# Altium PCB USB_C_PD_Sink.PcbDoc
Units mil, origin at the board's own origin, x right, y up, seen from the top; angles counter-clockwise.
Board outline 1181.1 x 787.4 mil, 2 copper layers (Top Layer, Bottom Layer); 22 components, 18 nets, 88 pads, 15 vias.
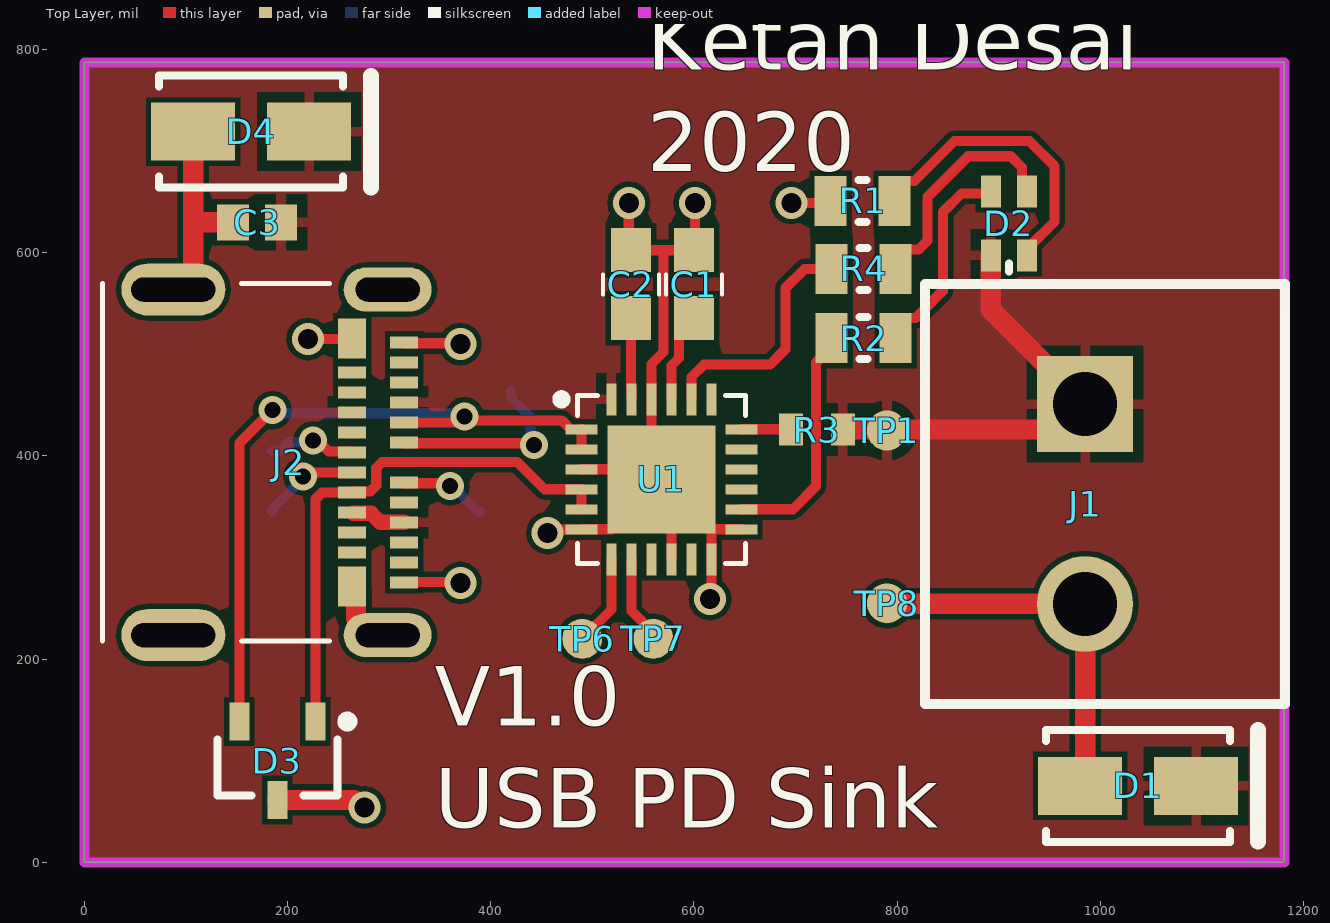
[diagram p0: Top Layer view]
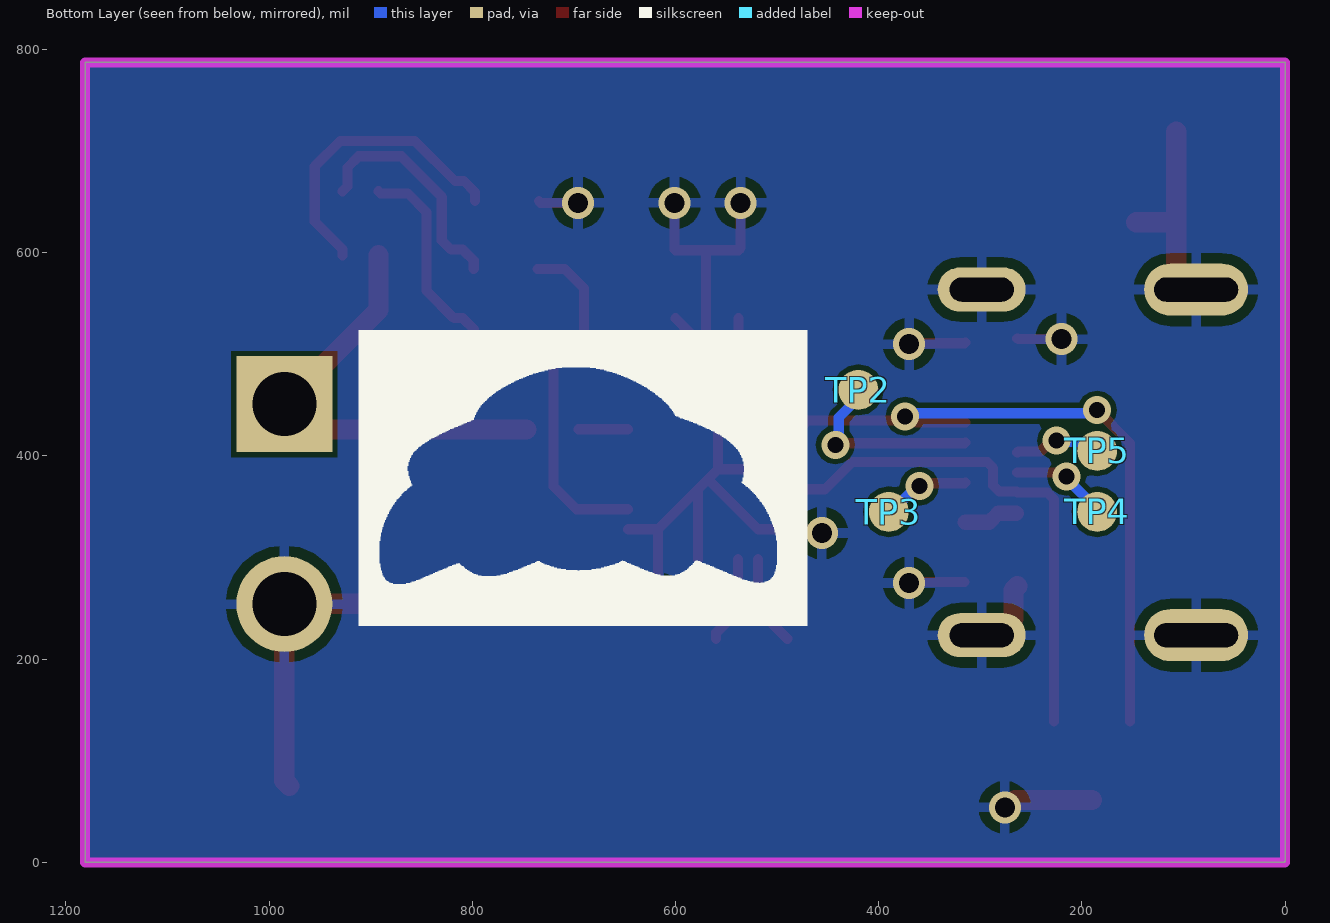
[diagram p1: Bottom Layer view, seen from below]
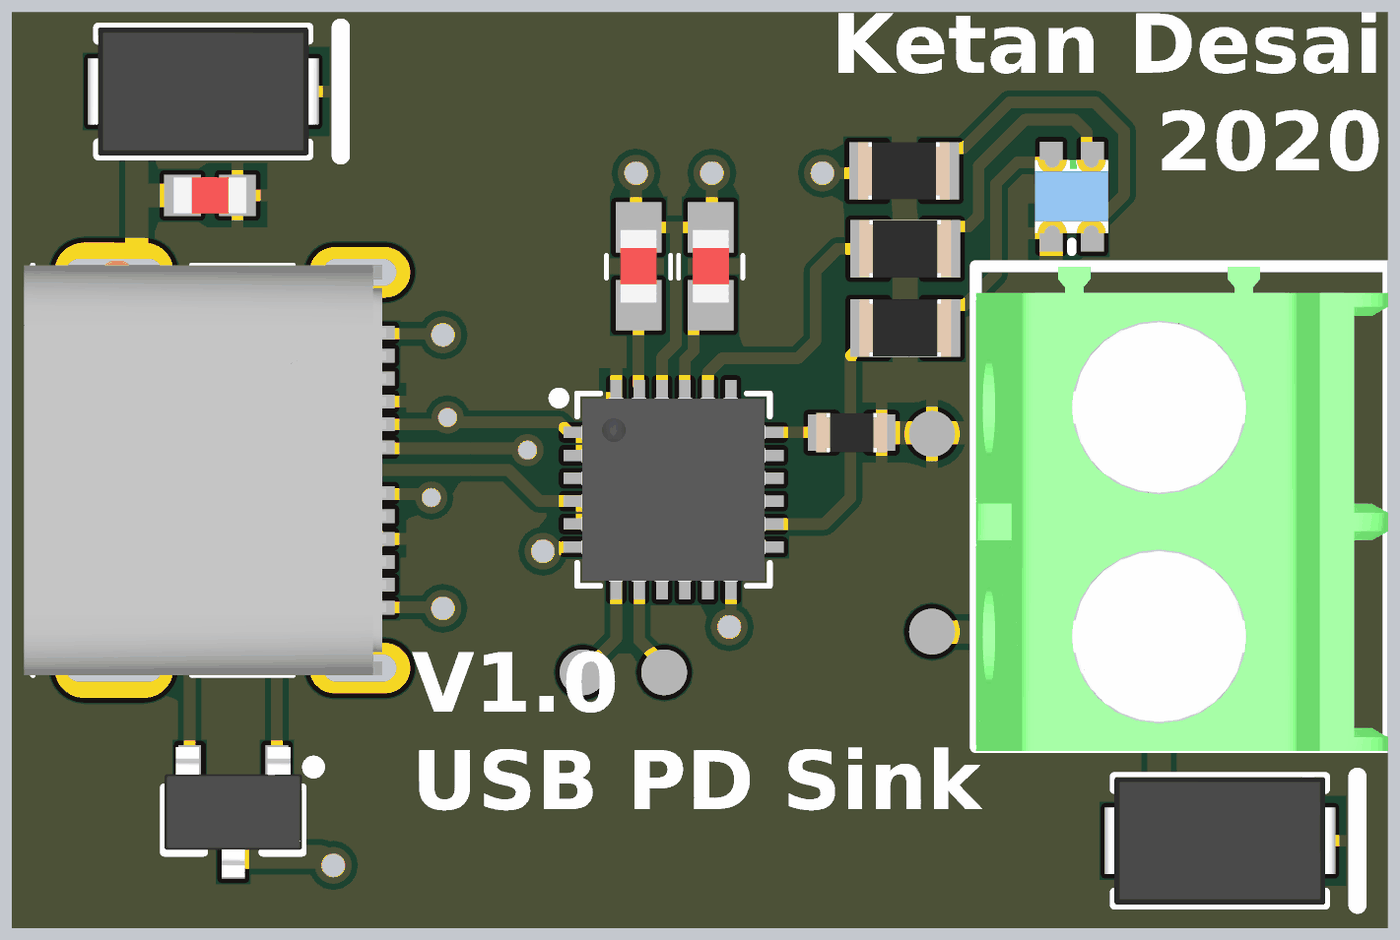
[diagram p2: 3D render of the assembled board from above, using the file's embedded part models]

## Layer stack, top to bottom
Top Solder: solder mask 0.4, Solder Resist, Dk 3.5
Top Layer: signal copper 1.4
Dielectric 1: dielectric 12.6, FR-4, Dk 4.8
Bottom Layer: signal copper 1.4
Bottom Solder: solder mask 0.4, Solder Resist, Dk 3.5

## Board outline
0,0 1181.1,0 1181.1,787.4 0,787.4

## Design rules (kind name [scope] priority, off if disabled: settings)
Clearance [All] p1: gap=5 ignorepadtopadclearanceinfootprint=FALSE
PolygonConnect [All] p1: connectstyle=Relief reliefconductorwidth=10 reliefentries=4 polygonreliefangle="90 Angle" airgapwidth=10
RoutingVias [All] p1: holewidth=27.56 width=39.37 viastyle="Through Hole" minholewidth=15.75 minwidth=27.56 maxholewidth=19.68 maxwidth=31.5
SolderMaskExpansion [All] p1: expansion=4 istentingtop=FALSE
Width [All] p1: maxlimit=20 minlimit=7 preferedwidth=10
30 further rules are at their usual default settings.

## Components (designator, comment, footprint, x,y, rotation, side; value= is the part's Value field where it differs from the comment)
C1 "C0603 1uF 10V X7R" C0603-IPC 600,569 r270 top value=1uF
C2 "C0603 1uF 10V X7R" C0603-IPC 538,569 r270 top value=1uF
C3 "4.7uF, 25V, X5R, 0603" C0603-HIGH-DENSITY 170,630 r0 top value=4.7uF
D1 "SMAJ22A" DO-214AC 1033,76 r270 top value=24.4V
D2 "RGB" LED_0606_RGB_WURTH 910,629 r90 top
D3 "ESDA25L" SOT23-3L 190,100 r270 top
D4 "SMAJ22A" DO-214AC 160,720 r270 top value=24.4V
J1 "Phoenix Contact 1935161" Phoenix_1935161 985,352.57 r270 top
J2 "USB C" "Molex USB-C" 166.34,393.7 r270 top locked
R1 "R0805 750 5%" R0805-High-Density 766,651 r0 top value=750
R2 "R0805 750 5%" R0805-High-Density 767,516 r0 top value=750
R3 "R0603 1K 1%" R0603-HIGH-DENSITY 721,426 r0 top value=1k
R4 "R0805 750 5%" R0805-High-Density 767,584 r0 top value=750
TP1 "VBUS" TESTPOINT_SMT 821.5,393.5 r90 top
TP2 "D1+" TESTPOINT_SMT 388.5,433.5 r90 bottom
TP3 "D1-" TESTPOINT_SMT 358.5,313.5 r90 bottom
TP4 "D2+" TESTPOINT_SMT 153.5,313.5 r90 bottom
TP5 "D2-" TESTPOINT_SMT 153.5,373.5 r90 bottom
TP6 "SCL" TESTPOINT_SMT 521.5,188.5 r90 top
TP7 "SDA" TESTPOINT_SMT 591.5,188.5 r90 top
TP8 "VBUS" TESTPOINT_SMT 821.5,223.5 r90 top
U1 "STUSB4500" "QFN24 - 4X4MM - PITCH 0.5MM - EXPOSEDPAD" 568,377 r0 top

## Footprints (in the part's own frame and the unit in brackets; to place one, negate y for a bottom-side part, rotate by r counter-clockwise, add the part's x,y. Pads: shape width x height; smd on the part's side, far side on the other; paste and mask are expansions set on the pad)
C0603-HIGH-DENSITY [mm] "Chip Capacitor, 2-Leads, Body 1.60x0.80mm, IPC High Density"
  rect 0.8x0.9 smd: 1(-0.6,0) 2(0.6,0)
  body extent -0.8,-0.4 0.8,0.4, height 0.3
C0603-IPC [mm]
  rect 1.1x1 smd: 1(-0.85,0) 2(0.85,0)
  silkscreen extent -0.24,-0.7 0.26,0.7, body extent -0.8,-0.4 0.8,0.4, height 0.3
DO-214AC [mm]
  rect 1.45x2.1 smd: 1(0.02,-1.343) 2(0.02,1.557)
  silkscreen extent -1.38,-2.19 1.42,3.11, body extent -1.38,-2.41 1.42,2.63, height 2.29
LED_0606_RGB_WURTH [mm] "Chip; Body 1.6 x 1.6 mm (LxW typ) WURTH"
  rect 0.8x0.5 smd: A(-0.8,0.45) BK(-0.8,-0.45) GK(0.8,-0.45) RK(0.8,0.45)
  silkscreen extent -1.2,0 -1,0, body extent -0.8,-0.8 0.8,0.8, height 0.4
"Molex USB-C" [mm] "MOLEX_105450-0101"
  rect 0.3x0.7 smd: A1(-3,3.77) A2(-2.5,3.77) A3(-2,3.77) A4(-1.5,3.77) A5(-1,3.77) A6(-0.5,3.77) A7(0.5,3.77) A8(1,3.77) A9(1.5,3.77) A10(2,3.77) A11(2.5,3.77) A12(3,3.77) B2(2.25,2.47) B3(1.75,2.47) B4(1.25,2.47) B5(0.75,2.47) B6(0.25,2.47) B7(-0.25,2.47) B8(-0.75,2.47) B9(-1.25,2.47) B10(-1.75,2.47) B11(-2.25,2.47)
  rect 1x0.7 smd: B1(3.1,2.47) B12(-3.1,2.47)
  oval 1.1x2.2 hole 0.6 slot 1.6 at 90 deg: S1(-4.32,3.36) S2(4.32,3.36)
  oval 1.3x2.6 hole 0.6 slot 2.1 at 90 deg: S3(-4.32,-2) S4(4.32,-2)
  silkscreen extent -4.47,-3.77 4.47,1.9, body extent -4.47,-3.96 4.47,3.94, height 3.22
Phoenix_1935161 [mm] "Phoenix Contact 1935161 2-pos terminal block"
  rect 2.4x2.4 hole 1.6: 1(-2.5,0)
  round 2.4 hole 1.6: 2(2.5,0)
  silkscreen extent -5.5,-4 5,5, body extent -5.48,-4 5.08,5, height 11.41
"QFN24 - 4X4MM - PITCH 0.5MM - EXPOSEDPAD" [mm] "QFN24 - 4X4mm - pitch 0.5mm - ExposedPAD"
  rect 2.7x2.7 smd: 0(0,0)
  rect 0.8x0.25 smd: 1(-2,1.25) 2(-2,0.75) 3(-2,0.25) 4(-2,-0.25) 5(-2,-0.75) 6(-2,-1.25) 13(2,-1.25) 14(2,-0.75) 15(2,-0.25) 16(2,0.25) 17(2,0.75) 18(2,1.25)
  rect 0.25x0.8 smd: 7(-1.25,-2) 8(-0.75,-2) 9(-0.25,-2) 10(0.25,-2) 11(0.75,-2) 12(1.25,-2) 19(1.25,2) 20(0.75,2) 21(0.25,2) 22(-0.25,2) 23(-0.75,2) 24(-1.25,2)
  silkscreen extent -2.6,-2.1 2.1,2.1, body extent -2,-2 2,2, height 1
R0603-HIGH-DENSITY [mm] "Chip Resistor, 2-Leads, Body 1.60x0.80mm, IPC High Density"
  rect 0.6x0.8 smd: 1(-0.65,0) 2(0.65,0)
  body extent -0.77,-0.43 0.78,0.43, height 0.44
R0805-High-Density [mm] "Chip Resistor, 2-Leads, Body 2.00x1.20mm, IPC High Density"
  rect 0.8x1.25 smd: 1(-0.8,0) 2(0.8,0)
  silkscreen extent -0.1,-0.53 0.1,0.53, body extent -1,-0.63 1,0.63, height 0.44
SOT23-3L [mm] "SOT23, 3-Leads, Body 2.90x2.55mm, Pitch 0.95mm, IPC Medium Density"
  rect 0.95x0.5 smd: 1(-0.98,0.95) 2(-0.98,-0.95) 3(0.98,0)
  silkscreen extent -1.1,-1.5 0.87,1.88, body extent -1.42,-1.5 1.42,1.5, height 1.2
TESTPOINT_SMT [mm]
  round 1 smd: 1(0.8,0.8)

## Part data
C1 C2: "Chip Capacitor, 0603, 1uF +/- 0.1uF, 10V, X7R", Max. Voltage=10V, Supplier Part Number 1=1276-1946-1-ND, EIA Code=X7R, Supplier 1=Digi-Key
C3: library part "C0603 4.7uF 25V X5R", "Chip Capacitor, 0603, 4.7uF, 25V, X5R", Max. Voltage=25V, Supplier Part Number 1=490-7203-1-ND, EIA Code=X5R, Supplier 1=Digi-Key, Supplier 2=Mouser, Supplier 3=LCSC, Supplier Part Number 2=81-GRM188R61E475KE1D, Supplier Part Number 3=C90057
D1 D4: "Bidirectional TVS DIODE 22V 35.5V DO214AC", Manufacturer="Littlefuse Inc.", Supplier Part Number 1=SMAJ22ALFCT-ND, Manufacturer’s ordering code=SMAJ22A, Part Number=SMAJ22A, Supplier 1=Digi-Key, Supplier 2=Mouser, Supplier 3=LCSC, Supplier Part Number 2=576-SMAJ22A, Supplier Part Number 3=C148220
D2: library part Led_RGB_0606, "RGB Led 1.6 x 1.6 mm Diffused", Manufacturer=Everlight, Manufacturer Part Number=19-237/R6GHBHW-C01/2T, Supplier Part Number 1=1080-1590-1-ND, Supplier 1=Digi-Key
D3: "Dual Transil Array For ESD Protection in SOT23-3 Vbr = 25V", Manufacturer=STMicroelectronics, Supplier Part Number 1=497-4642-1-ND, Manufacturer Part Number=ESDA25L, Supplier 1=Digi-Key, Supplier 2=Mouser, Supplier 3=LCSC, Supplier Part Number 2=511-ESDA25L, Supplier Part Number 3=C95343
J1: library part "Term Block 2pos", "Terminal Block, 2 Position, 5mm pitch, 18A, 300V, 12-26 AWG", Manufacturer="Phoenix Contact", Manufacturer Part Number=1935161, Supplier Part Number 1=277-1667-ND, Supplier 1=Digi-Key
J2: "USB-C USB 3.1 Gen 2, Superspeed+_ Receptacle Connector 24 Position Surface Mount, Right Angle; Through Hole", Package=None, Supplier Part Number 1=WM12856CT-ND, Digi-Key_Part_Number=WM12856CT-ND, Digi-Key_Purchase_URL=https://www.digikey.tw/product-detail/en/molex/1054500101/WM12856CT-ND/5843891?utm_source=snapeda&utm_medium=aggregator&utm_campaign=symbol, MF=Molex, MP=1054500101, SnapEDA_Link=https://www.snapeda.com/parts/1054500101/Molex/view-part/448528/?ref=snap, Supplier 1=Digi-Key, Supplier 2=Mouser, Supplier 3=LCSC, Supplier Part Number 2=538-105450-0101, Supplier Part Number 3=C134092
R1 R2 R4: library part "R0603 750 1%", "Chip Resistor, 0603, 750 ohms, 0.5W", Supplier Part Number 1=P750ADCT-ND, Supplier 1=Digi-Key, Supplier 2=Mouser, Supplier 3=LCSC, Supplier Part Number 2=667-ERJ-P06J751V, Supplier Part Number 3=C441948
R3: "RES SMD 1K OHM 1% 1/10W 0603", Operating Temperature="-55°C ~ 155°C", Supplier Part Number 1=RMCF0603FG1K00CT-ND, Temperature Coefficient=±100ppm/°C, Tolerance=±1%, Features="Automotive AEC-Q200", Supplier 1=Digi-Key
TP1 TP2 TP3 TP4 TP5 TP6 TP7 TP8: library part Testpoint_SMT, "SMT Test Point"
U1: library part STUSB4500QTR, "Standalone USB PD controller  with SINK auto-run mode in QFN24 4x4mm", Manufacturer=STMicroelectronics, Supplier Part Number 1=497-18060-1-ND, Manufacturer’s ordering code=STUSB4500QTR, Part Number="Standalone USB PD controller  with SINK auto-run mode in QFN24 4x4mm", Supplier 1=Digi-Key, Supplier 2=Mouser, Supplier Part Number 2=511-STUSB4500QTR

## Via types
v1: diameter 31.5, hole 19.68, Top Layer to Bottom Layer, tented both sides, 9 vias
v2: diameter 27.56, hole 15.75, Top Layer to Bottom Layer, tented both sides, 6 vias

## Nets (pads, with @x,y where several pads share a name; then routed paths per layer and width w, separated by ;. In a path a pad name is that pad's centre, name@x,y a point inside that pad or via, vN(x,y) a via of type N, cw(c..) or ccw(c..) an arc to the next point about the centre after c; other vN are vias at no path point)
CC1: D3.2 J2.A5 U1.1 U1.2 | length 702.5
  Top Layer w10: D3.2 152.6,412.6 v2(185,445) ; J2.A5 363.32,433.07 369.28,439.04 378.79,439.04 382.82,435 469.8,435 U1.1@478.51,426.29 ; U1.2 U1.1
  Bottom Layer w10: v2(185,445) 187.98,442.02 371.05,442.02 v2(374.04,439.04)
CC2: D3.1 J2.B5 U1.4 U1.5 | length 536.7
  Top Layer w10: D3.1 227.4,357.4 234.17,364.17 J2.B5 264.49,365.08 281.5,365.08 287.36,370.94 287.36,388.14 293.22,394 426,394 452.84,367.16 U1.4 U1.5
GND: C1.1 C2.1 C3.1 D1.1 D3.3 D4.1 J1.2 J2.A1 J2.A12 J2.B1 J2.B12 J2.S1 J2.S2 J2.S3 J2.S4 R1.1 TP8.1 U1.0 U1.3 U1.6 U1.10 U1.12 U1.13 U1.22 | length 1764
  Top Layer w10: v1(220,515) 262.83,515 J2.B12 ; J2.A1 315.67,510.91 369.09,510.91 v1(370,510) ; J2.A12@315.67,275.91 v1@369.09,275.91 ; v1(455.91,324.09) 459.52,327.71 489.18,327.71 U1.6 489.34,327.87 518.87,327.87 U1.0 ; U1.3 U1.0@558.16,386.84 ; v1(535.91,649.09) 535.91,604.56 C2.1 570,602.46 C1.1 600.91,603.37 v1(600.91,649.09) ; 570,600 570,502.32 558.16,490.48 U1.22 U1.0@558.16,386.84 ; U1.10 U1.0@577.84,367.16 ; v1(615.91,259.09) 617.13,260.32 617.13,298.18 U1.12 617.13,298.34 U1.0@617.13,327.87 ; U1.13 646.66,327.87 U1.0@617.13,327.87 ; v1(695.91,649.09) 732.6,649.09 R1.1 ; U1.0@558.16,386.84 U1.0 ; U1.0 U1.0@577.84,367.16 ; U1.0@577.84,367.16 U1.0@617.13,327.87
  Top Layer w20: J2.S3 92.72,563.78 107.13,578.18 107.13,630 ; D4.1 107.13,630 ; C3.1 107.13,630 ; D3.3 265.47,61.42 272.79,54.09 v1(275.91,54.09) ; J2.B1 267.36,267.87 267.36,239.54 283.28,223.62 J2.S2 ; TP8.1 790.43,254.57 984.57,254.57 J1.2 985,80.09 D1.1
  other v1: 370,275
NetC1_2: C1.2 U1.21 | length 89
  Top Layer w10: U1.21 577.84,488.95 585.31,496.42 585.31,520.85 C1.2
NetC2_2: C2.2 U1.23 | length 80
  Top Layer w10: C2.2 538,466.88 538.47,466.41 U1.23
NetD2_BK: D2.BK R1.2 | length 296.3
  Top Layer w10: R1.2 797.5,659.86 808.24,670.61 817.1,670.61 856.5,710 930,710 955,685 955,630.69 927.72,603.41 D2.BK
NetD2_GK: D2.GK R4.2 | length 230.4
  Top Layer w10: R4.2 798.5,592.32 809.24,603.07 821,603.07 830,612.07 830,655 870,695 911.73,695 922.87,683.86 922.87,665.34 D2.GK
NetD2_RK: D2.RK R2.2 | length 195.4
  Top Layer w10: R2.2@798.5,524.86 809.24,535.61 818.1,535.61 845,562.5 845,640 863.3,658.3 890.09,658.3 D2.RK
NetJ2_A6: J2.A6 TP2.1 | length 192.3
  Top Layer w10: J2.A6 315.67,412.48 441.15,412.48 v2(442.66,410.97)
  Bottom Layer w10: TP2.1 420,457.05 439.3,437.75 439.3,414.33 v2(442.66,410.97)
NetJ2_A7: J2.A7 TP3.1 | length 87.3
  Top Layer w10: J2.A7 315.67,373.11 357.11,373.11 v2(360,370.22)
  Bottom Layer w10: v2(360,370.22) 362.39,370.22 387.61,345 TP3.1
NetJ2_B6: J2.B6 TP4.1 | length 97.6
  Top Layer w10: v2(215,380) 219.75,380 223.61,383.86 J2.B6
  Bottom Layer w10: TP4.1 185,347.5 215,377.5 v2(215,380)
NetJ2_B7: J2.B7 TP5.1 | length 87.5
  Top Layer w10: v2(225,415.05) 229.75,415.05 240.35,404.45 262.68,404.45 J2.B7
  Bottom Layer w10: TP5.1 192.95,405 201.75,413.8 223.76,413.8 v2(225,415.05)
NetR2_1: R2.1 U1.14 | length 235
  Top Layer w10: U1.14 697.47,347.47 720,370 720,491.64 735.5,507.14 R2.1
NetR3_1: R3.1 U1.18 | length 48.8
  Top Layer w10: U1.18 695.2,426.21 R3.1
NetR4_1: R4.1 U1.20 | length 239
  Top Layer w10: U1.20 597.61,455.82 597.61,477.61 610,490 675,490 690,505 690,565 709,584 R4.1
SCL: TP6.1 U1.7 | length 90.2
  Top Layer w10: TP6.1 518.79,248.79 U1.7
SDA: TP7.1 U1.8 | length 87.2
  Top Layer w10: U1.8 538.47,247.52 560,226 TP7.1
VBUS: C3.2 D1.2 D2.A D4.2 J1.1 J2.A4 J2.A9 J2.B4 J2.B9 R3.2 TP1.1 U1.24 | length 487.7
  Top Layer w15: J2.B4@264.49,343.58 282.31,343.58 291.25,334.65 J2.A9
  Top Layer w20: R3.2 790,426 960,426 J1.1 892.28,543.72 D2.A
pads on no net: J2.A2 J2.A3 J2.A8 J2.A10 J2.A11 J2.B2 J2.B3 J2.B8 J2.B10 J2.B11 U1.9 U1.11 U1.15 U1.16 U1.17 U1.19

## Polygon pours and split planes (outlines as drawn)
VBUS on Top Layer "VBUS_L01_P000" (solid, remove dead copper, pour order 0): 0,787.4 0,0 1181.1,0 1181.1,787.4
GND on Bottom Layer "GND_L02_P001" (solid, remove dead copper, pour order 1): 0,787.4 1181.1,787.4 1181.1,0 0,0

## Keep-outs
Keep-Out Layer:
  the board outline again, w10

## Silkscreen, mask and mechanical layers (free items; w line width, h text height)
Top Overlay:
  text "Ketan Desai / 2020" at 554,661 h100
  text "V1.0 / USB PD Sink" at 345,15 h100
Bottom Overlay:
  region: 759 vertices and 1 holes, not listed, extent 470.36,232.63 911.88,523.89
Bottom Solder:
  drawing of 5 lines, arcs and shapes, not listed